# EAGLE board blt (EAGLE 7.2.0)

Size 100 x 80 mm. Coordinates in mm from the lower left corner, seen from the top.
Outline: 0,0 100,0 100,80 0,80 0,0
Copper layers (1*16): Top 0.035mm / dielectric 1.5mm / Bottom 0.035mm
Design rules "default": minimum track width 10mil, minimum drill 24mil, track to track 8mil, track to pad 8mil, pad to pad 8mil, via to via 8mil, smd to smd 8mil, copper to edge 40mil, drill to drill 8mil, minimum pad ring 10mil, minimum via ring 8mil, stop-mask expansion 4mil, vias tented up to drill 0mil, thermal gap 10mil

## Footprints (pad centres in the part's own frame; a part is rotated, then mirrored left to right if it is on the bottom)
C1206 = smd 1.6 x 1.8: 1 -1.4,0; 2 1.4,0
UD-4X5,8_NICHICON = smd 2 x 1: + 1.425,0; - -1.425,0
SO14 = smd 0.6 x 2.2: 1 -3.81,-2.6; 2 -2.54,-2.6; 3 -1.27,-2.6; 4 0,-2.6; 5 1.27,-2.6; 6 2.54,-2.6; 7 3.81,-2.6; 8 3.81,2.6; 9 2.54,2.6; 10 1.27,2.6; 11 0,2.6; 12 -1.27,2.6; 13 -2.54,2.6; 14 -3.81,2.6
1X02 = drill 1.016 long: 1 -1.27,0; 2 1.27,0
1X03 = drill 1.016 long: 1 -2.54,0; 2 0,0; 3 2.54,0
R1206 = smd 1.6 x 1.803: 1 -1.422,0; 2 1.422,0

## Placement (x,y rotation side)
C1  680p  [C1206]  2.54,-33.02 0 top  (outside the outline)
C2  220p  [C1206]  2.54,-38.1 0 top  (outside the outline)
C3  470p  [C1206]  2.54,-50.8 0 top  (outside the outline)
C4  4u  [UD-4X5,8_NICHICON]  -5.08,-62.23 0 top  (outside the outline)
IC1  TL074D  [SO14]  50.8,40.64 270 bottom
IC2  TL074D  [SO14]  6.35,-6.35 0 top  (outside the outline)
JP1  [1X02]  50.8,49.53 0 top
JP2  BAL_OUT1  [1X03]  69.85,11.43 0 top
JP3  Bal_OUT2  [1X03]  55.88,11.43 0 top
JP4  UNBAL_IN  [1X03]  44.45,5.08 0 top
R1  1k  [R1206]  62.23,41.91 90 bottom
R2  33k  [R1206]  36.83,12.7 0 bottom
R3  33k  [R1206]  43.18,19.05 0 bottom
R4  100  [R1206]  74.93,29.21 0 bottom
R5  100  [R1206]  69.85,36.83 0 bottom
R6  1k  [R1206]  31.75,25.4 0 bottom
R7  33k  [R1206]  20.32,19.05 0 bottom
R8  33k  [R1206]  39.37,46.99 0 bottom
R9  100  [R1206]  19.05,38.1 0 bottom
R10  100  [R1206]  27.94,46.99 0 bottom
R11  6k8  [R1206]  2.54,-13.97 0 top  (outside the outline)
R12  6k8  [R1206]  2.54,-20.32 0 top  (outside the outline)
R13  5k6  [R1206]  2.54,-26.67 0 top  (outside the outline)
R14  100  [R1206]  2.54,-44.45 0 top  (outside the outline)
R15  10k  [R1206]  2.54,-57.15 0 top  (outside the outline)
R16  20k  [R1206]  2.54,-63.5 0 top  (outside the outline)

## Library data of the parts
C1-C4 R1-R16 = rcl
IC1 IC2 = linear
JP1-JP4 = pinhead

## Nets
+15V: IC1.4 IC2.4 JP1.2
+OUT1: JP2.1 R4.2
+OUT2: JP3.1 R9.2
-15V: IC1.11 IC2.11 JP1.1
-OUT1: JP2.3 R5.2
-OUT2: JP3.3 R10.2
AGND: C1.2 C2.2 IC1.5 IC1.12 JP2.2 JP3.2 JP4.2 R16.1
IN1: JP4.3 R1.1 R2.1
IN2: JP4.1 R6.1 R7.1
N$1: IC1.3 R1.2
N$2: IC1.6 R2.2 R3.1
N$3: IC1.1 IC1.2 R4.1
N$4: R11.1 R12.2
N$5: C2.1 C3.1 IC2.3 R11.2
N$6: IC1.7 R3.2 R5.1
N$7: IC1.10 R6.2
N$8: IC1.8 IC1.9 R9.1
N$9: C1.1 R12.1 R13.2
N$10: IC1.13 R7.2 R8.1
N$11: IC1.14 R8.2 R10.1
N$12: C3.2 IC2.1 R14.1 R15.2
N$13: IC2.2 R15.1 R16.2
N$14: C4.- R13.1

## Tracks (layer width: path | path; a pad name or v marks a point on that pad's centre or on a via)
+15V  (2 unrouted)
+OUT1  (1 unrouted)
+OUT2  (1 unrouted)
-15V  (2 unrouted)
-OUT1  (1 unrouted)
-OUT2  (1 unrouted)
AGND  (7 unrouted)
IN1  (2 unrouted)
IN2  (2 unrouted)
N$1  (1 unrouted)
N$2  (2 unrouted)
N$3  (2 unrouted)
N$4  (1 unrouted)
N$5  (3 unrouted)
N$6  (2 unrouted)
N$7  (1 unrouted)
N$8  (2 unrouted)
N$9  (2 unrouted)
N$10  (2 unrouted)
N$11  (2 unrouted)
N$12  (3 unrouted)
N$13  (2 unrouted)
N$14  (1 unrouted)